# EAGLE board v001 (EAGLE 6.4)
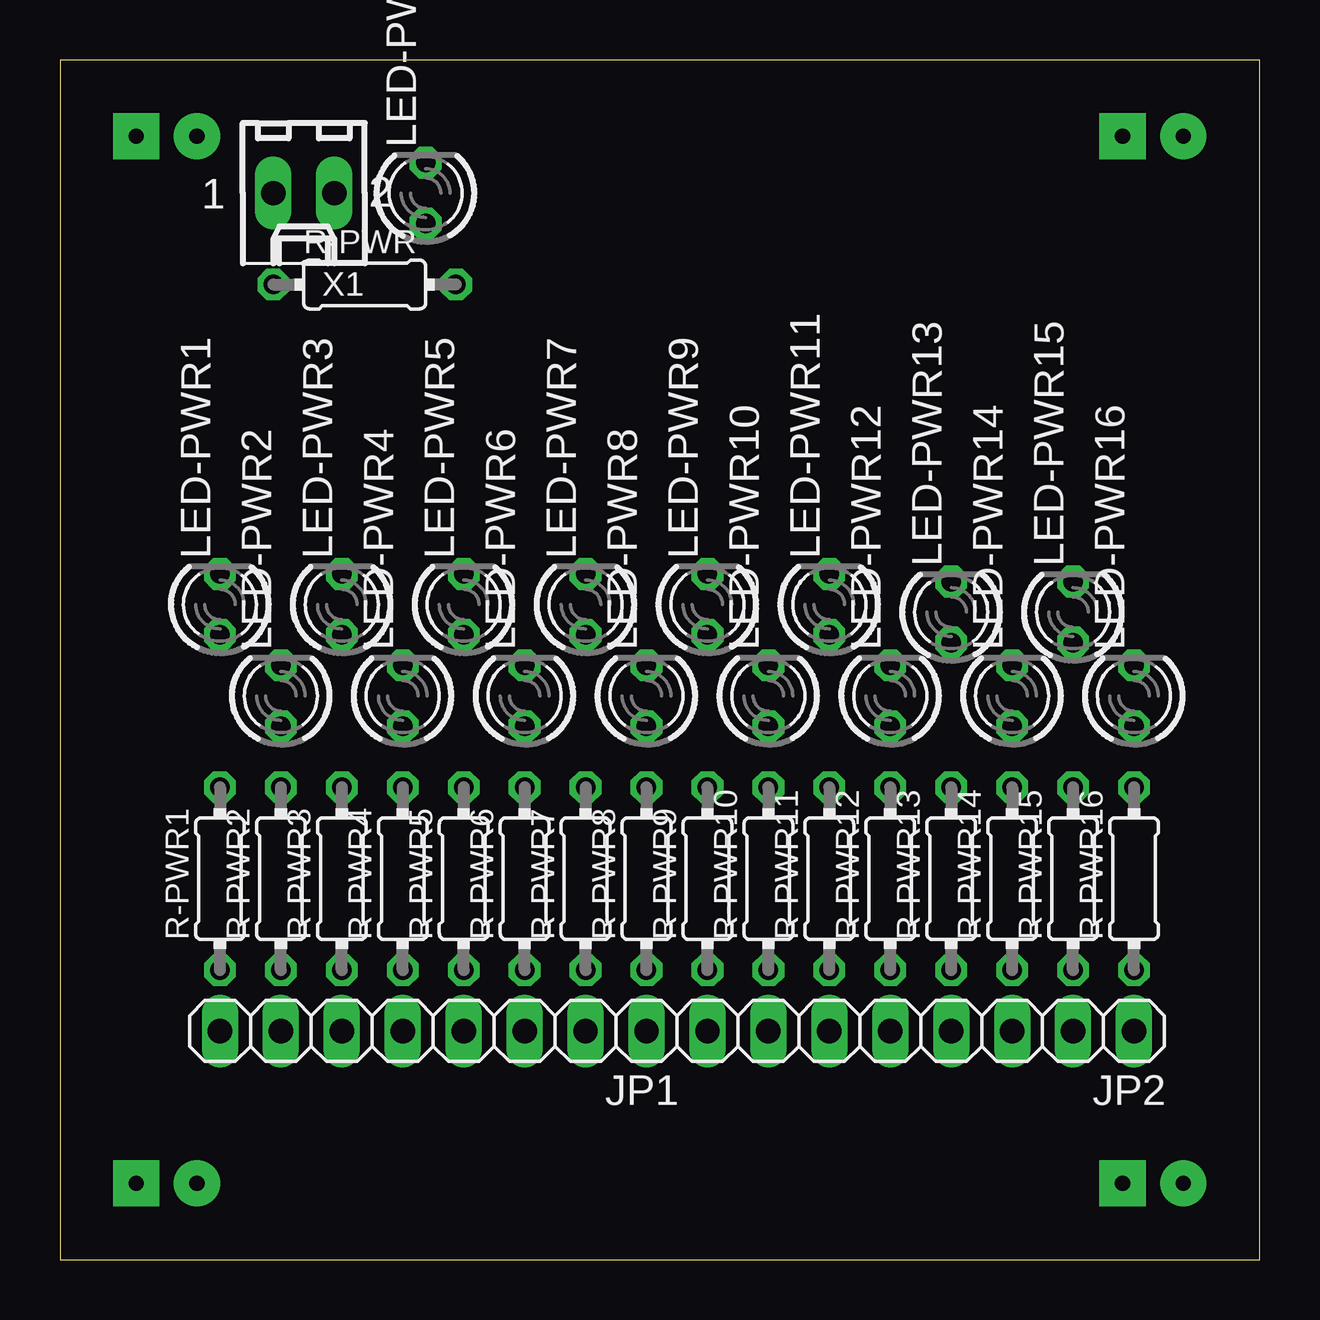
[diagram p0: board, top side]
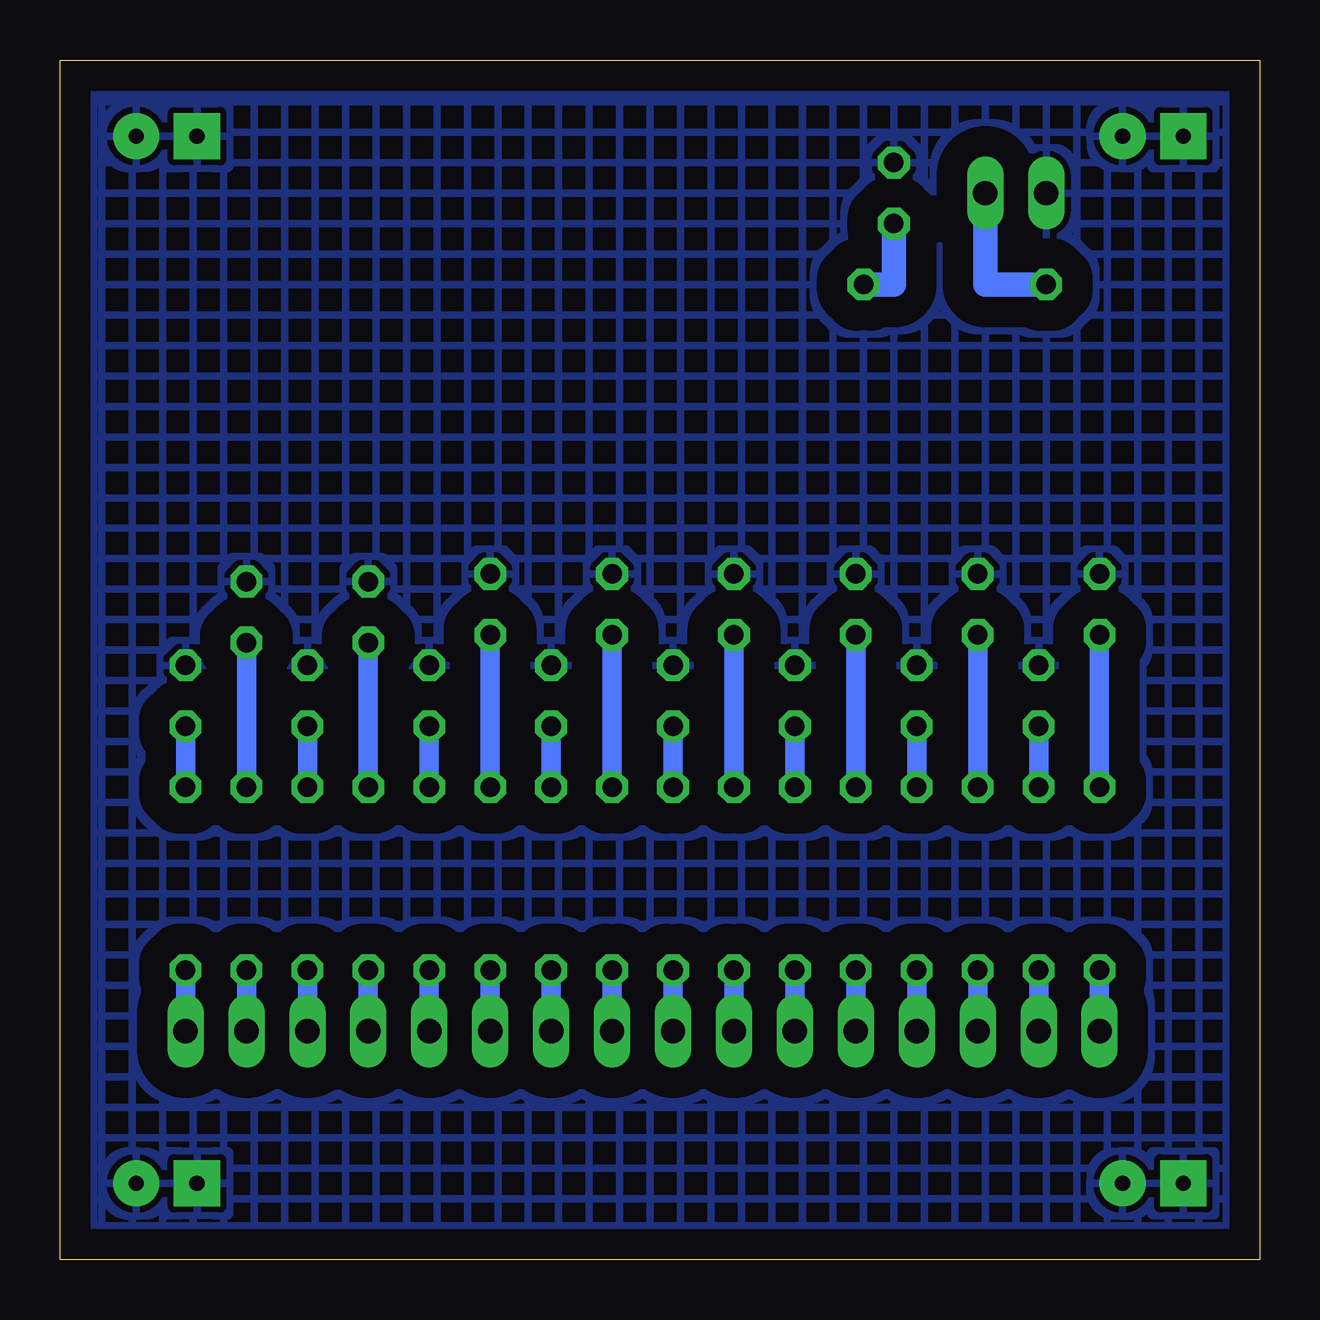
[diagram p1: board, bottom side, seen from below]

Size 50 x 50 mm. Coordinates in mm from the lower left corner, seen from the top.
Outline: 0,0 50,0 50,50 0,50 0,0
Copper layers (1*16): Top 0.035mm / dielectric 1.5mm / Bottom 0.035mm
Design rules "default": minimum track width 10mil, minimum drill 24mil, track to track 8mil, track to pad 8mil, pad to pad 8mil, via to via 8mil, smd to smd 8mil, copper to edge 40mil, drill to drill 8mil, minimum pad ring 10mil, minimum via ring 8mil, stop-mask expansion 4mil, vias tented up to drill 0mil, thermal gap 10mil

## Footprints (pad centres in the part's own frame; a part is rotated, then mirrored left to right if it is on the bottom)
1X08 = drill 1.016 long: 1 -8.89,0; 2 -6.35,0; 3 -3.81,0; 4 -1.27,0; 5 1.27,0; 6 3.81,0; 7 6.35,0; 8 8.89,0
LED3MM = drill 0.813 octagon: A -1.27,0; K 1.27,0
PCB_05X05 = drill 0.64 pad 1.93 square: GND@1 3.175,46.825; GND@2 44.285,46.825; GND@7 3.175,3.175; GND@8 44.285,3.175 | drill 0.64 pad 1.93: GND@3 46.825,46.825; GND@4 5.715,46.825; GND@5 46.825,3.175; GND@6 5.715,3.175
0204/7 = drill 0.813 octagon: 1 -3.81,0; 2 3.81,0
6410-02 = drill 1.016 long: 1 1.27,0; 2 -1.27,0

## Placement (x,y rotation side)
JP1  [1X08]  15.56,9.53 180 top
JP2  [1X08]  35.88,9.53 180 top
LED-PWR  Green  [LED3MM]  15.24,44.45 90 top
LED-PWR1  Yellow  [LED3MM]  6.67,27.3 90 top
LED-PWR2  Yellow  [LED3MM]  9.21,23.5 90 top
LED-PWR3  Yellow  [LED3MM]  11.75,27.3 90 top
LED-PWR4  Yellow  [LED3MM]  14.29,23.5 90 top
LED-PWR5  Yellow  [LED3MM]  16.83,27.3 90 top
LED-PWR6  Yellow  [LED3MM]  19.37,23.5 90 top
LED-PWR7  Yellow  [LED3MM]  21.91,27.3 90 top
LED-PWR8  Yellow  [LED3MM]  24.45,23.5 90 top
LED-PWR9  Yellow  [LED3MM]  26.99,27.3 90 top
LED-PWR10  Yellow  [LED3MM]  29.53,23.5 90 top
LED-PWR11  Yellow  [LED3MM]  32.07,27.3 90 top
LED-PWR12  Yellow  [LED3MM]  34.61,23.5 90 top
LED-PWR13  Yellow  [LED3MM]  37.15,26.99 90 top
LED-PWR14  Yellow  [LED3MM]  39.69,23.5 90 top
LED-PWR15  Yellow  [LED3MM]  42.23,26.99 90 top
LED-PWR16  Yellow  [LED3MM]  44.77,23.5 90 top
PCB1  PCB05X05  [PCB_05X05]  0,0 0 top
R-PWR  470R  [0204/7]  12.7,40.64 0 top
R-PWR1  470R  [0204/7]  6.67,15.88 90 top
R-PWR2  470R  [0204/7]  9.21,15.88 90 top
R-PWR3  470R  [0204/7]  11.75,15.88 90 top
R-PWR4  470R  [0204/7]  14.29,15.88 90 top
R-PWR5  470R  [0204/7]  16.83,15.88 90 top
R-PWR6  470R  [0204/7]  19.37,15.88 90 top
R-PWR7  470R  [0204/7]  21.91,15.88 90 top
R-PWR8  470R  [0204/7]  24.45,15.88 90 top
R-PWR9  470R  [0204/7]  26.99,15.88 90 top
R-PWR10  470R  [0204/7]  29.53,15.88 90 top
R-PWR11  470R  [0204/7]  32.07,15.88 90 top
R-PWR12  470R  [0204/7]  34.61,15.88 90 top
R-PWR13  470R  [0204/7]  37.15,15.88 90 top
R-PWR14  470R  [0204/7]  39.69,15.88 90 top
R-PWR15  470R  [0204/7]  42.23,15.88 90 top
R-PWR16  470R  [0204/7]  44.77,15.88 90 top
X1  5V In  [6410-02]  10.16,44.45 180 top

## Library data of the parts
JP1 JP2 = pinhead
LED-PWR LED-PWR1-LED-PWR16 = led
PCB1 = GNLib
R-PWR R-PWR1-R-PWR16 = rcl
X1 = con-molex; OC_FARNELL: unknown; OC_NEWARK: unknown

## Nets
+5V: R-PWR.1 X1.2
GND: LED-PWR1.K LED-PWR2.K LED-PWR3.K LED-PWR4.K LED-PWR5.K LED-PWR6.K LED-PWR7.K LED-PWR8.K LED-PWR9.K LED-PWR10.K LED-PWR11.K LED-PWR12.K LED-PWR13.K LED-PWR14.K LED-PWR15.K LED-PWR16.K LED-PWR.K PCB1.GND@1 PCB1.GND@2 PCB1.GND@3 PCB1.GND@4 PCB1.GND@5 PCB1.GND@6 PCB1.GND@7 PCB1.GND@8 X1.1
N$1: JP1.8 R-PWR1.1
N$2: JP1.7 R-PWR2.1
N$3: LED-PWR.A R-PWR.2
N$4: JP1.6 R-PWR3.1
N$5: JP1.5 R-PWR4.1
N$6: JP1.4 R-PWR5.1
N$7: JP1.3 R-PWR6.1
N$8: JP1.2 R-PWR7.1
N$9: JP1.1 R-PWR8.1
N$10: LED-PWR1.A R-PWR1.2
N$11: LED-PWR2.A R-PWR2.2
N$12: LED-PWR3.A R-PWR3.2
N$13: LED-PWR4.A R-PWR4.2
N$14: LED-PWR5.A R-PWR5.2
N$15: LED-PWR6.A R-PWR6.2
N$16: LED-PWR7.A R-PWR7.2
N$17: LED-PWR8.A R-PWR8.2
N$18: JP2.8 R-PWR9.1
N$19: JP2.7 R-PWR10.1
N$20: JP2.6 R-PWR11.1
N$21: JP2.5 R-PWR12.1
N$22: JP2.4 R-PWR13.1
N$23: JP2.3 R-PWR14.1
N$24: JP2.2 R-PWR15.1
N$25: JP2.1 R-PWR16.1
N$26: LED-PWR9.A R-PWR9.2
N$27: LED-PWR10.A R-PWR10.2
N$28: LED-PWR11.A R-PWR11.2
N$29: LED-PWR12.A R-PWR12.2
N$30: LED-PWR13.A R-PWR13.2
N$31: LED-PWR14.A R-PWR14.2
N$32: LED-PWR15.A R-PWR15.2
N$33: LED-PWR16.A R-PWR16.2

## Tracks (layer width: path | path; a pad name or v marks a point on that pad's centre or on a via)
+5V
  Bottom 1.016: X1.2 11.43,40.64 R-PWR.1
GND
  pour Bottom (isolate 1.27, hatched): 0,0 0,50 50,50 50,0
N$1
  Bottom 0.813: JP1.8 R-PWR1.1
N$2
  Bottom 0.813: JP1.7 R-PWR2.1
N$3
  Bottom 1.016: LED-PWR.A 15.24,40.64 R-PWR.2
N$4
  Bottom 0.813: JP1.6 R-PWR3.1
N$5
  Bottom 0.813: JP1.5 R-PWR4.1
N$6
  Bottom 0.813: JP1.4 R-PWR5.1
N$7
  Bottom 0.813: JP1.3 R-PWR6.1
N$8
  Bottom 0.813: JP1.2 R-PWR7.1
N$9
  Bottom 0.813: JP1.1 R-PWR8.1
N$10
  Bottom 0.813: R-PWR1.2 LED-PWR1.A
N$11
  Bottom 0.813: LED-PWR2.A R-PWR2.2
N$12
  Bottom 0.813: R-PWR3.2 LED-PWR3.A
N$13
  Bottom 0.813: LED-PWR4.A R-PWR4.2
N$14
  Bottom 0.813: R-PWR5.2 LED-PWR5.A
N$15
  Bottom 0.813: LED-PWR6.A R-PWR6.2
N$16
  Bottom 0.813: R-PWR7.2 LED-PWR7.A
N$17
  Bottom 0.813: R-PWR8.2 LED-PWR8.A
N$18
  Bottom 0.813: JP2.8 R-PWR9.1
N$19
  Bottom 0.813: R-PWR10.1 JP2.7
N$20
  Bottom 0.813: JP2.6 R-PWR11.1
N$21
  Bottom 0.813: R-PWR12.1 JP2.5
N$22
  Bottom 0.813: JP2.4 R-PWR13.1
N$23
  Bottom 0.813: R-PWR14.1 JP2.3
N$24
  Bottom 0.813: JP2.2 R-PWR15.1
N$25
  Bottom 0.813: JP2.1 R-PWR16.1
N$26
  Bottom 0.813: R-PWR9.2 LED-PWR9.A
N$27
  Bottom 0.813: R-PWR10.2 LED-PWR10.A
N$28
  Bottom 0.813: R-PWR11.2 LED-PWR11.A
N$29
  Bottom 0.813: R-PWR12.2 LED-PWR12.A
N$30
  Bottom 0.813: R-PWR13.2 LED-PWR13.A
N$31
  Bottom 0.813: R-PWR14.2 LED-PWR14.A
N$32
  Bottom 0.813: R-PWR15.2 LED-PWR15.A
N$33
  Bottom 0.813: R-PWR16.2 LED-PWR16.A